# Altium PCB controller.PcbDoc (part 1 of 2)
Units mm, origin at the board's own origin, x right, y up, seen from the top; angles counter-clockwise.
Board outline 61.75 x 57 mm, 2 copper layers (Top Layer, Bottom Layer), stack 1.57 mm thick; 231 components, 171 nets, 622 pads, 230 vias.
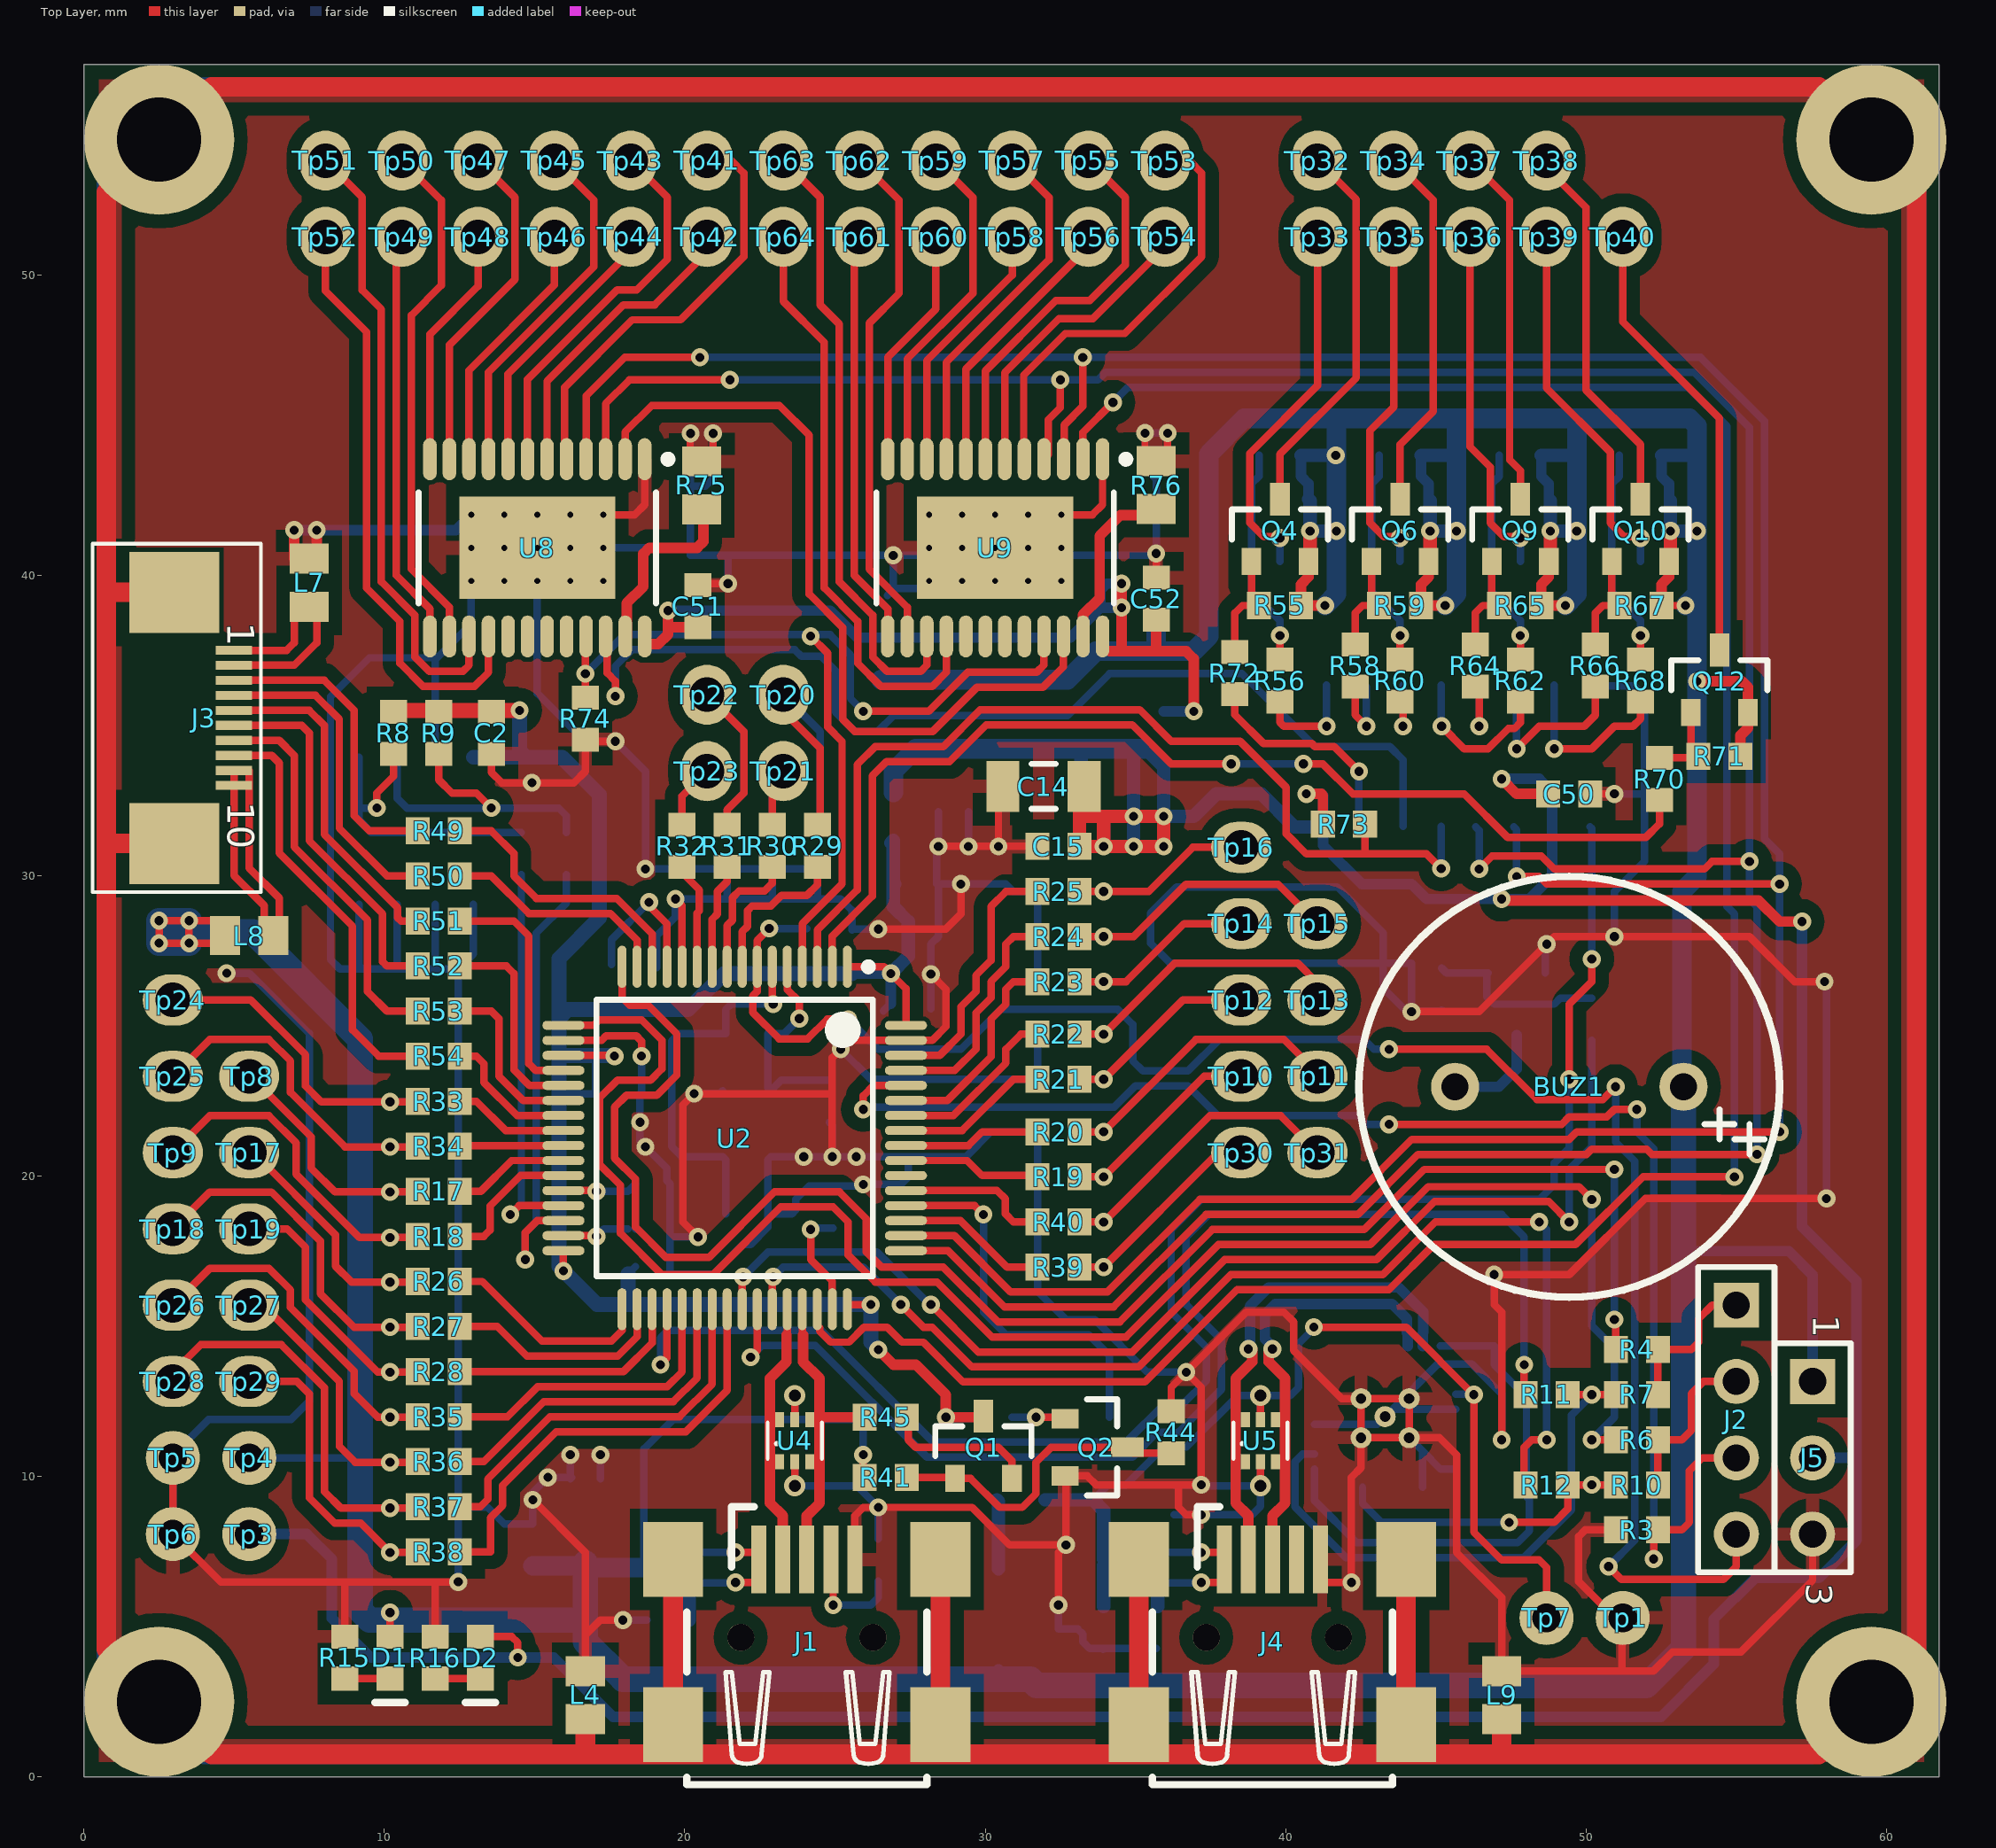
[diagram p0: Top Layer view]
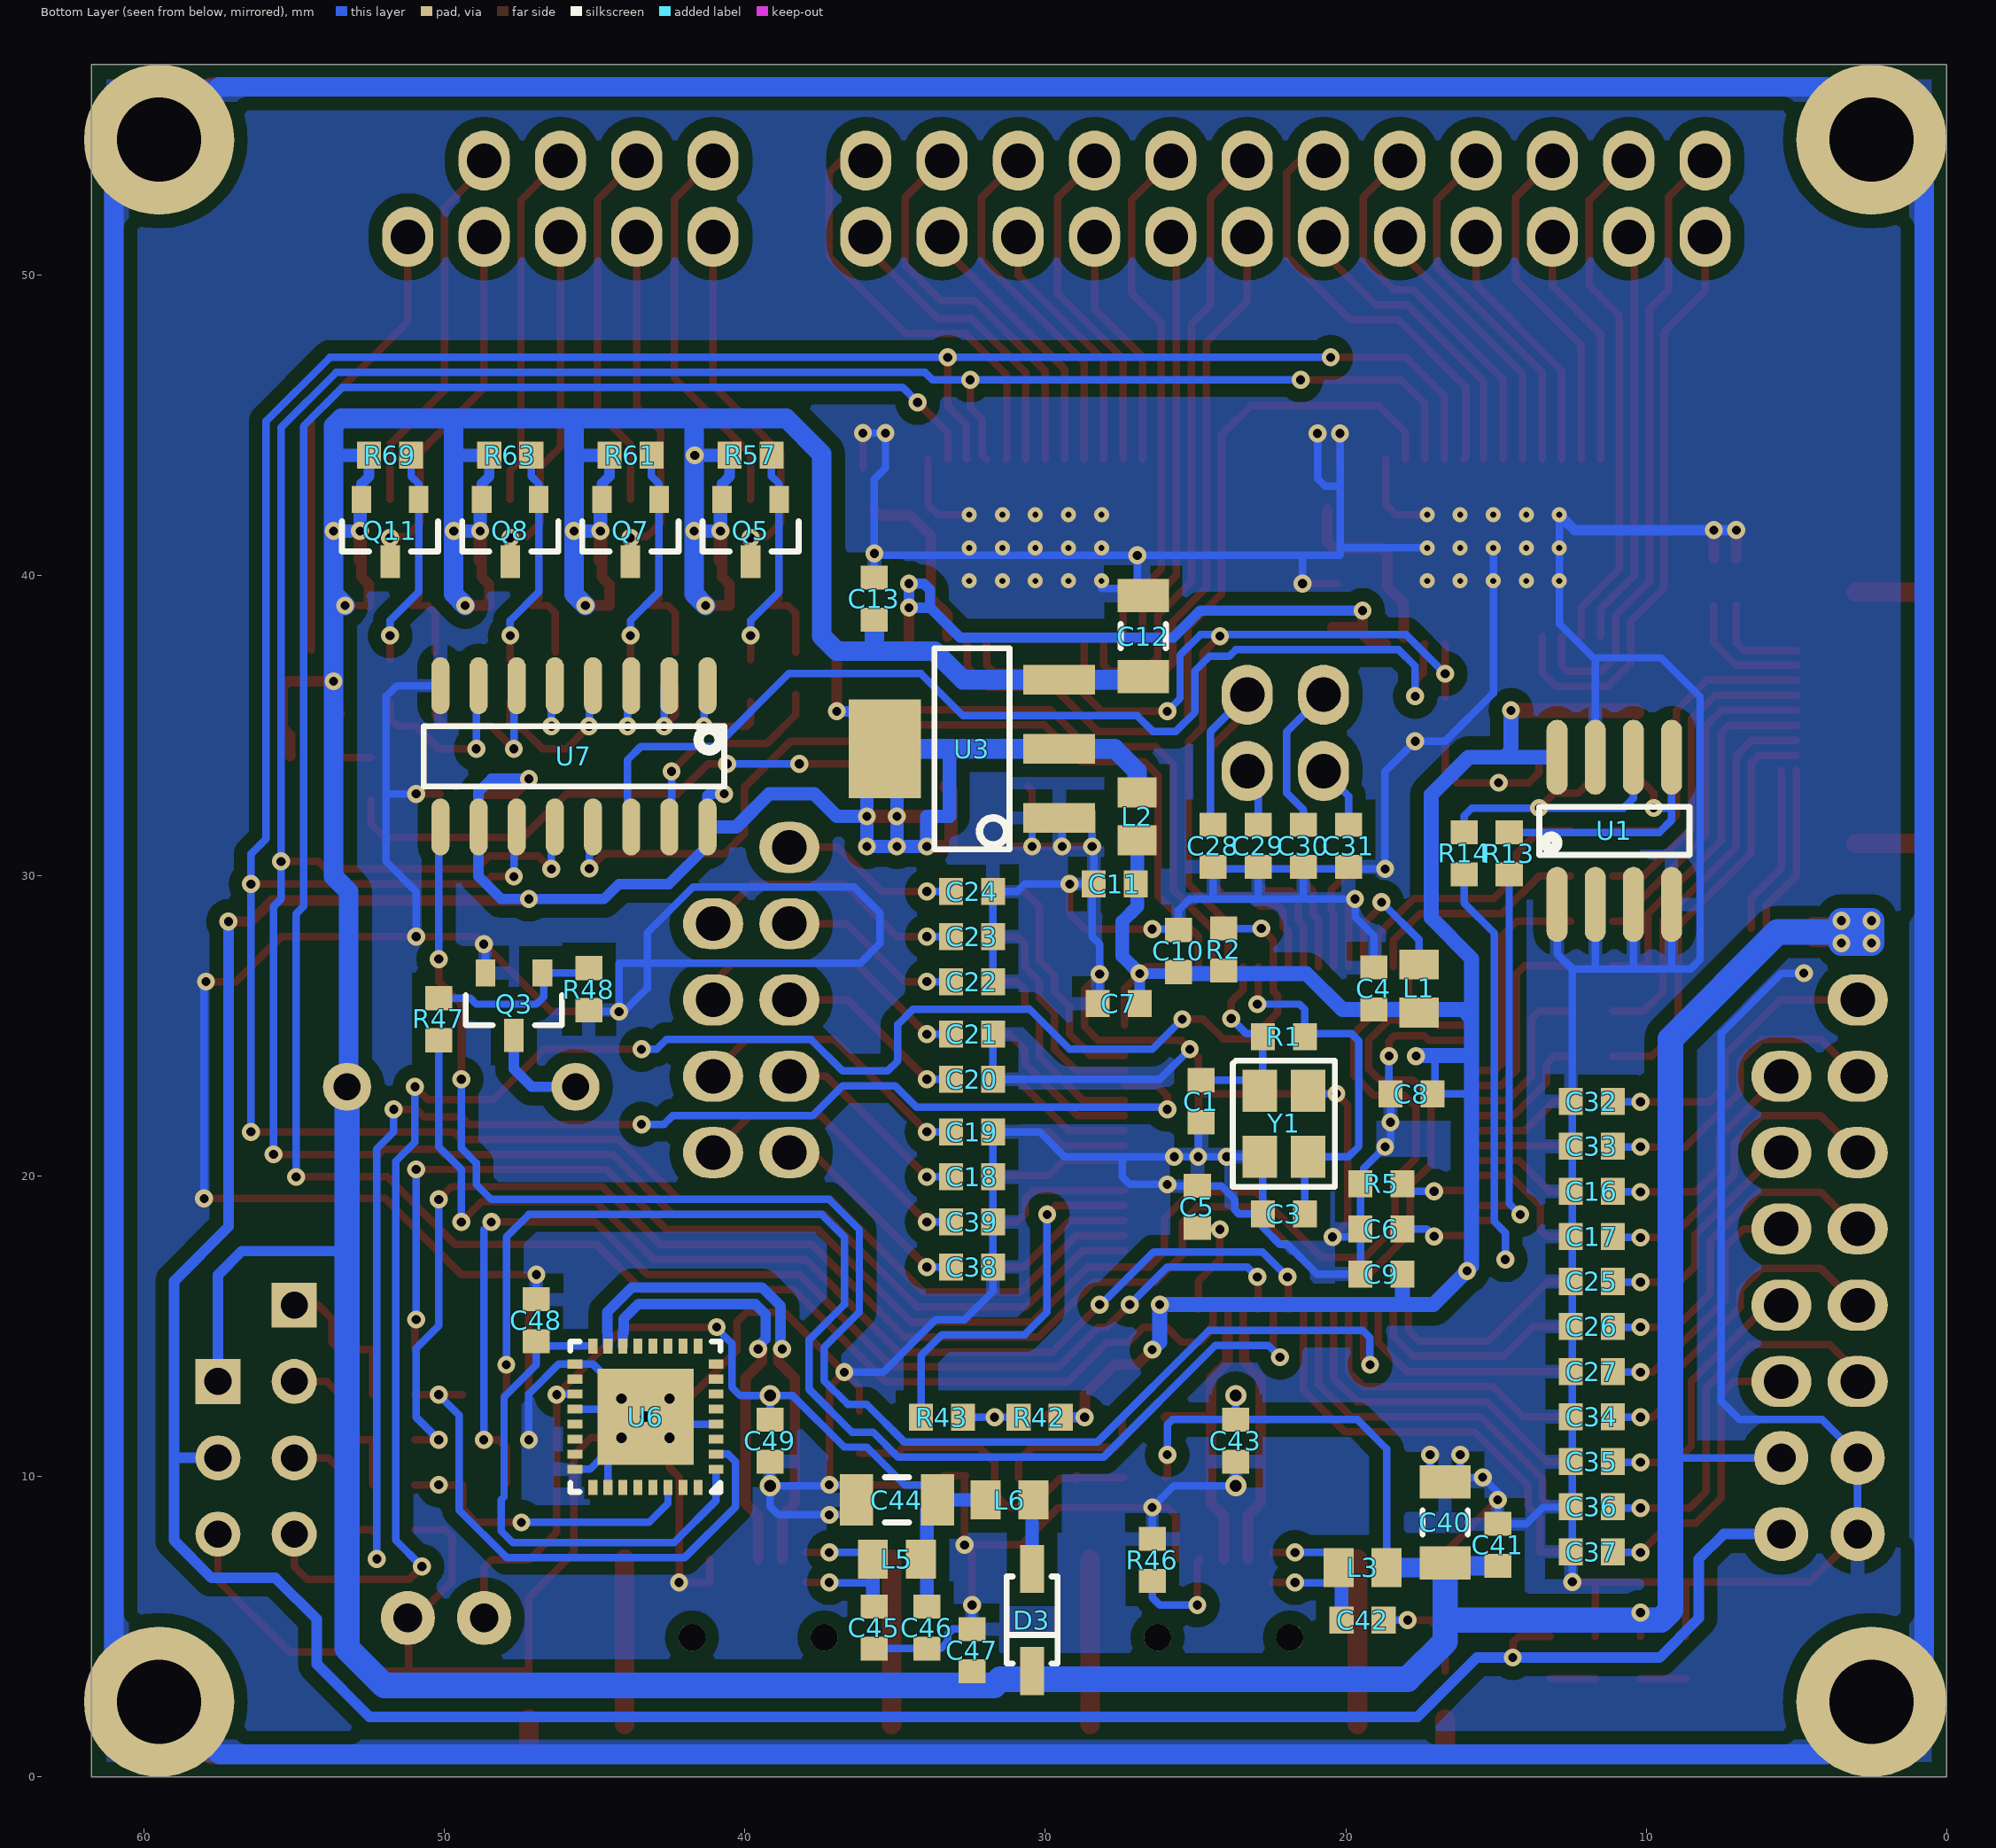
[diagram p1: Bottom Layer view, seen from below]
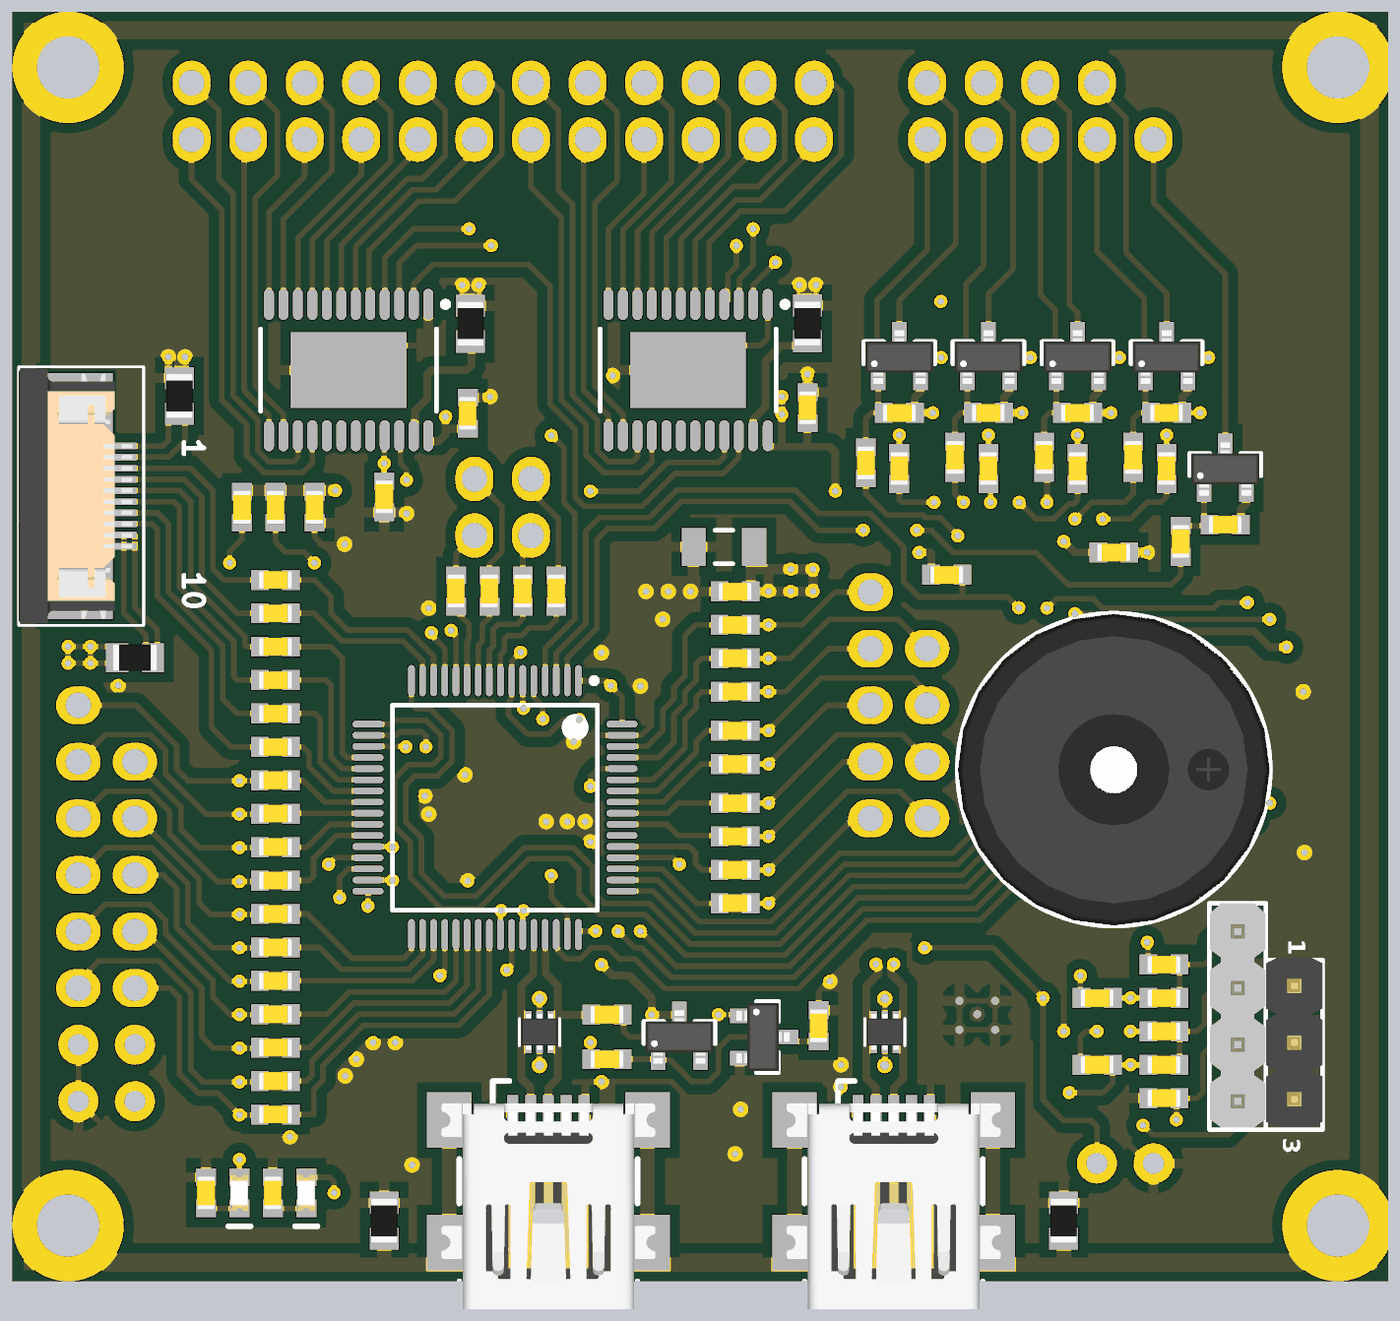
[diagram p3: 3D render of the assembled board from above, using the file's embedded part models]
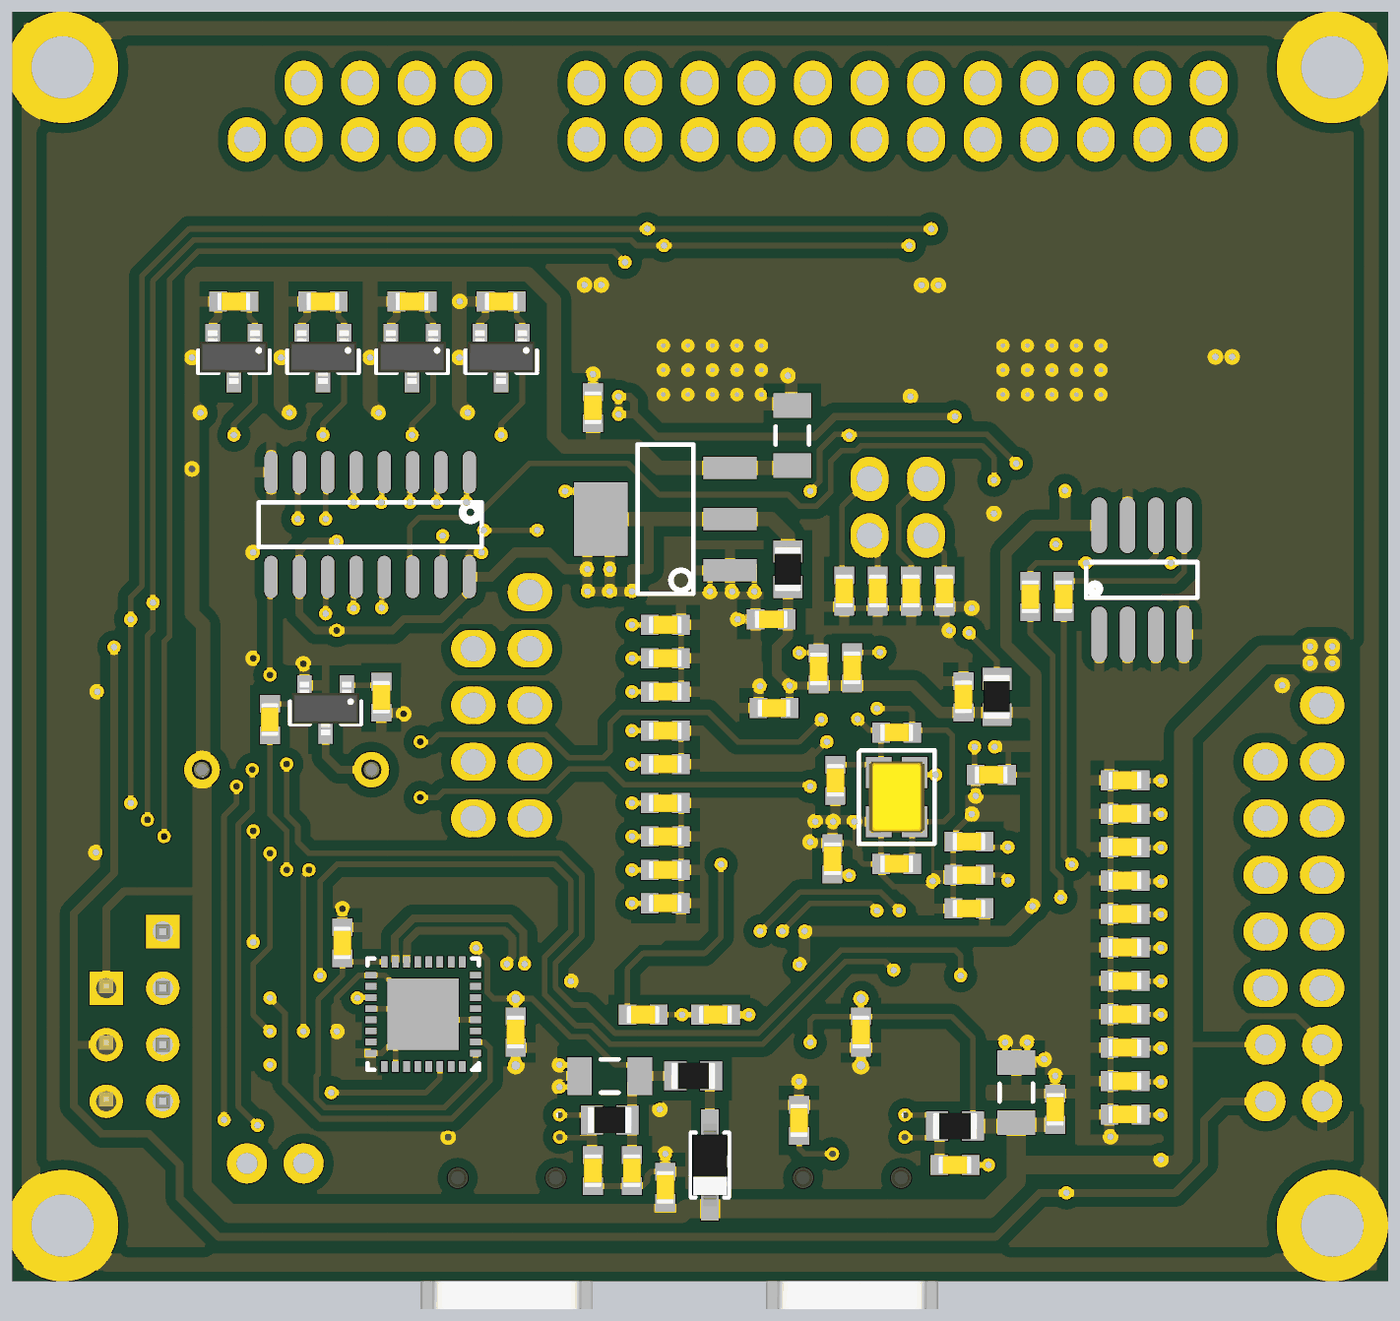
[diagram p4: 3D render of the assembled board from below, using the file's embedded part models]

## Layer stack, top to bottom
Top Solder: solder mask 0.0102, Solder Resist, Dk 3.5
Top Layer: signal copper 0.035
Dielectric1: core 1.5, FR-4, Dk 4.2
Bottom Layer: signal copper 0.035
Bottom Solder: solder mask 0.0102, Solder Resist, Dk 3.5

## Board outline
0,0 61.75,0 61.75,57 0,57

## Design rules (kind name [scope] priority, off if disabled: settings)
Clearance Clearance_comp [incomponent('u9','u8','u6','u5','u4','u2','j3')] p1: gap=0.15
Clearance [All vs not InAnyDifferentialPair] p2: gap=0.25 except(0.45: Arc-Fill Arc-Poly Track-Fill Track-Poly SMDPad-Fill SMDPad-Poly THPad-Fill THPad-Poly Via-Fill Via-Poly Fill-Fill Fill-Poly Poly-Poly)
ComponentClearance ComponentClearance_con [HasFootprint('HEADER_1X3_2.54MM_THD') or HasFootprint('HEADER_1X4_2.54MM_THD')] p1: gap=0 collisioncheckmode=3 verticalgap=0 showdistances=FALSE
ComponentClearance [All] p2: gap=0.25 collisioncheckmode=3 verticalgap=0.25 showdistances=FALSE
DiffPairsRouting [All] p1: maxlimit=0.2 minlimit=0.2 mostfreqgap=0.2 toplayer_minwidth=0.25 toplayer_maxwidth=1 toplayer_prefwidth=0.25 bottomlayer_minwidth=0.25 bottomlayer_maxwidth=1 bottomlayer_prefwidth=0.25 maxuncoupledlength=12.7
HoleSize [All] p1: absolutevalues=TRUE maxlimit=10 minlimit=0.2 maxpercent=80.000 minpercent=20.000
HoleToHoleClearance [All] p1: gap=0.25 allowstackedmicrovias=TRUE
MinimumSolderMaskSliver [All] p1: minsoldermaskwidth=0.15
PlaneClearance [All] p1: clearance=0.5
PlaneConnect PlaneConnect_via [isvia] p1: planeconnectstyle=Direct reliefexpansion=0.508 reliefentries=4 reliefconductorwidth=0.254 reliefairgap=0.254
PlaneConnect [All] p2: planeconnectstyle=Relief reliefexpansion=0.6 reliefentries=4 reliefconductorwidth=0.35 reliefairgap=0.35
PolygonConnect PolygonConnect_hole [(ObjectKind = 'Pad') And (Name = 'Free-Hole') And (AsMM(HoleDiameter) = 2.8)] p1: connectstyle=Direct reliefconductorwidth=0.254 reliefentries=4 polygonreliefangle="90 Angle" airgapwidth=0.254
PolygonConnect PolygonConnect_via [isvia] p2: connectstyle=Direct reliefconductorwidth=0.254 reliefentries=4 polygonreliefangle="90 Angle" airgapwidth=0.254
PolygonConnect [All] p3: connectstyle=Relief reliefconductorwidth=0.45 reliefentries=4 polygonreliefangle="90 Angle" airgapwidth=0.45
RoutingCorners [All] p1: cornerstyle=45-Degree minsetback=2.5 maxsetback=2.5
RoutingVias [All] p1: holewidth=0.3 width=0.6 viastyle="Through Hole" minholewidth=0.2 minwidth=0.35 maxholewidth=0.5 maxwidth=1
SilkToSilkClearance [All] p1: silktosilkclearance=0.1
SilkToSolderMaskClearance [IsPad] p1: minsilkscreentomaskgap=0.15 clearancetoexposedcopper=TRUE
SolderMaskExpansion SolderMaskExpansion_via [isVia] p1: expansion=-10
SolderMaskExpansion [All] p2: expansion=0.05
Width [All] p1: maxlimit=5 minlimit=0.15 preferedwidth=0.25
20 further rules are at their usual default settings.

## Classes and differential pairs
net class Power: +3.3V +5V VDD
net class sipo: EN_LED_COL EN_LED_ROW PA13 PA14 PA15 PB15
net class usb_diff: USB_N USB_P
differential pair FTDIUSB: +FTDIUSB_P -FTDIUSB_N
differential pair USB: +USB_P -USB_N

## Components (designator, comment, footprint, x,y, rotation, side; value= is the part's Value field where it differs from the comment)
BUZ1 "BUZZER" BUZZER_14MM_THD 49.44,22.97 r180 top
C1 "27pF" 0603_[1608] 24.81,22.49 r270 bottom
C2 "100nF" 0603_[1608] 13.56,34.75 r90 top
C3 "27pF" 0603_[1608] 22.06,18.74 r0 bottom
C4 "1uF" 0603_[1608] 19.06,26.24 r90 bottom
C5 "2.2uF" 0603_[1608] 24.94,18.97 r270 bottom
C6 "2.2uF" 0603_[1608] 18.81,18.24 r180 bottom
C7 "100nF" 0603_[1608] 27.56,25.74 r0 bottom
C8 "100nF" 0603_[1608] 17.81,22.74 r0 bottom
C9 "100nF" 0603_[1608] 18.81,16.74 r0 bottom
C10 "100nF" 0603_[1608] 25.56,27.49 r90 bottom
C11 "4.7uF" 0603_[1608] 27.69,29.72 r180 bottom
C12 "10uF" 1206_[3216] 26.74,37.97 r90 bottom
C13 "100nF" 0603_[1608] 35.69,39.22 r270 bottom
C14 "10uF" 1206_[3216] 31.94,32.97 r180 top
C15 "100nF" 0603_[1608] 32.44,30.97 r0 top
C16 "100nF" 0603_[1608] 11.81,19.49 r0 bottom
C17 "100nF" 0603_[1608] 11.81,17.99 r0 bottom
C18 "100nF" 0603_[1608] 32.44,19.97 r180 bottom
C19 "100nF" 0603_[1608] 32.44,21.47 r180 bottom
C20 "100nF" 0603_[1608] 32.44,23.22 r180 bottom
C21 "100nF" 0603_[1608] 32.44,24.72 r180 bottom
C22 "100nF" 0603_[1608] 32.44,26.47 r180 bottom
C23 "100nF" 0603_[1608] 32.44,27.97 r180 bottom
C24 "100nF" 0603_[1608] 32.44,29.47 r180 bottom
C25 "100nF" 0603_[1608] 11.81,16.49 r0 bottom
C26 "100nF" 0603_[1608] 11.81,14.99 r0 bottom
C27 "100nF" 0603_[1608] 11.81,13.49 r0 bottom
C28 "100nF" 0603_[1608] 24.41,30.99 r270 bottom
C29 "100nF" 0603_[1608] 22.91,30.99 r270 bottom
C30 "100nF" 0603_[1608] 21.41,30.99 r270 bottom
C31 "100nF" 0603_[1608] 19.91,30.99 r270 bottom
C32 "100nF" 0603_[1608] 11.81,22.49 r0 bottom
C33 "100nF" 0603_[1608] 11.81,20.99 r0 bottom
C34 "100nF" 0603_[1608] 11.81,11.99 r0 bottom
C35 "100nF" 0603_[1608] 11.81,10.49 r0 bottom
C36 "100nF" 0603_[1608] 11.81,8.99 r0 bottom
C37 "100nF" 0603_[1608] 11.81,7.49 r0 bottom
C38 "100nF" 0603_[1608] 32.44,16.97 r180 bottom
C39 "100nF" 0603_[1608] 32.44,18.47 r180 bottom
C40 "4.7uF" 1206_[3216] 16.69,8.47 r90 bottom
C41 "100nF" 0603_[1608] 14.94,7.72 r90 bottom
C42 "10nF" 0603_[1608] 19.44,5.22 r180 bottom
C43 "100nF" 0603_[1608] 23.66,11.19 r90 bottom
C44 "4.7uF" 1206_[3216] 34.94,9.22 r0 bottom
C45 "10nF" 0603_[1608] 35.69,4.97 r270 bottom
C46 "100nF" 0603_[1608] 33.94,4.97 r270 bottom
C47 "100nF" 0603_[1608] 32.44,4.22 r270 bottom
C48 "100nF" 0603_[1608] 46.94,15.195 r90 bottom
C49 "100nF" 0603_[1608] 39.16,11.19 r90 bottom
C50 "100nF" 0603_[1608] 49.44,32.72 r0 top
C51 "100nF" 0603_[1608] 20.44,38.97 r270 top
C52 "100nF" 0603_[1608] 35.69,39.22 r270 top
D1 "+5V" 0603_[1608]_K2-A1_LED 10.19,3.97 r270 top
D2 "+3.3V" 0603_[1608]_K2-A1_LED 13.19,3.97 r270 top
D3 "MBR120VLSFT1G" SOD-123 30.44,5.22 r270 bottom
J1 "Mini USB Type B" usb_typeB_mini_smd 24.06,4.49 r0 top
J2 "PCB Conn" HEADER_1X4_2.54MM_THD 55,11.89 r270 top
J3 "Display" fcc-zif_10pin_0.5mm 4,35.25 r270 top
J4 "Mini USB Type B" usb_typeB_mini_smd 39.56,4.49 r0 top
J5 "PCB Conn" HEADER_1X3_2.54MM_THD 57.54,10.62 r270 top
L1 "220 ohm @ 100MHz" 0805_[2012] 17.56,26.24 r90 bottom
L2 "220 ohm @ 100MHz" 0805_[2012] 26.94,31.97 r270 bottom
L3 "220 ohm @ 100MHz" 0805_[2012] 19.44,6.97 r0 bottom
L4 "220 ohm @ 100MHz" 0805_[2012] 16.69,2.72 r270 top
L5 "220 ohm @ 100MHz" 0805_[2012] 34.94,7.24 r0 bottom
L6 "220 ohm @ 100MHz" 0805_[2012] 31.19,9.22 r0 bottom
L7 "220 ohm @ 100MHz" 0805_[2012] 7.5,39.75 r270 top
L8 "220 ohm @ 100MHz" 0805_[2012] 5.5,28 r0 top
L9 "220 ohm @ 100MHz" 0805_[2012] 47.19,2.72 r270 top
Q1 "BC817" SOT-23 29.94,10.97 r90 top
Q2 "BC817" SOT-23 33.69,10.97 r0 top
Q3 "BC817" SOT-23 47.69,25.72 r270 bottom
Q4 "MOSFET P" SOT-23 39.81,41.49 r90 top
Q5 "MOSFET P" SOT-23 39.81,41.49 r270 bottom
Q6 "MOSFET P" SOT-23 43.81,41.49 r90 top
Q7 "MOSFET P" SOT-23 43.81,41.49 r270 bottom
Q8 "MOSFET P" SOT-23 47.81,41.49 r270 bottom
Q9 "MOSFET P" SOT-23 47.81,41.49 r90 top
Q10 "MOSFET P" SOT-23 51.81,41.49 r90 top
Q11 "MOSFET P" SOT-23 51.81,41.49 r270 bottom
Q12 "MOSFET P" SOT-23 54.44,36.47 r90 top
R1 "1M" 0603_[1608] 22.06,24.64 r0 bottom
R2 "10K" 0603_[1608] 24.06,27.54 r90 bottom
R3 "10K" 0603_[1608] 51.69,8.22 r0 top
R4 "33R" 0603_[1608] 51.69,14.22 r0 top
R5 "10K" 0603_[1608] 18.81,19.74 r0 bottom
R6 "33R" 0603_[1608] 51.69,11.22 r0 top
R7 "33R" 0603_[1608] 51.69,12.72 r180 top
R8 "10K" 0603_[1608] 10.31,34.75 r90 top
R9 "10K" 0603_[1608] 11.81,34.75 r90 top
R10 "33R" 0603_[1608] 51.69,9.72 r180 top
R11 "33R" 0603_[1608] 48.69,12.72 r0 top
R12 "33R" 0603_[1608] 48.69,9.72 r0 top
R13 "33R" 0603_[1608] 14.56,30.74 r270 bottom
R14 "33R" 0603_[1608] 16.06,30.74 r270 bottom
R15 "680R" 0603_[1608] 8.69,3.97 r270 top
R16 "180R" 0603_[1608] 11.69,3.97 r270 top
R17 "33R" 0603_[1608] 11.81,19.49 r0 top
R18 "33R" 0603_[1608] 11.81,17.99 r0 top
R19 "33R" 0603_[1608] 32.44,19.97 r180 top
R20 "33R" 0603_[1608] 32.44,21.47 r180 top
R21 "33R" 0603_[1608] 32.44,23.22 r180 top
R22 "33R" 0603_[1608] 32.44,24.72 r180 top
R23 "33R" 0603_[1608] 32.44,26.47 r180 top
R24 "33R" 0603_[1608] 32.44,27.97 r180 top
R25 "33R" 0603_[1608] 32.44,29.47 r180 top
R26 "33R" 0603_[1608] 11.81,16.49 r0 top
R27 "33R" 0603_[1608] 11.81,14.99 r0 top
R28 "33R" 0603_[1608] 11.81,13.49 r0 top
R29 "33R" 0603_[1608] 24.41,30.99 r270 top
R30 "33R" 0603_[1608] 22.91,30.99 r270 top
R31 "33R" 0603_[1608] 21.41,30.99 r270 top
R32 "33R" 0603_[1608] 19.91,30.99 r270 top
R33 "33R" 0603_[1608] 11.81,22.49 r0 top
R34 "33R" 0603_[1608] 11.81,20.99 r0 top
R35 "33R" 0603_[1608] 11.81,11.99 r0 top
R36 "33R" 0603_[1608] 11.81,10.49 r0 top
R37 "33R" 0603_[1608] 11.81,8.99 r0 top
R38 "33R" 0603_[1608] 11.81,7.49 r0 top
R39 "33R" 0603_[1608] 32.44,16.97 r180 top
R40 "33R" 0603_[1608] 32.44,18.47 r180 top
R41 "10k" 0603_[1608] 26.69,9.97 r0 top
R42 "47k" 0603_[1608] 30.19,11.97 r0 bottom
R43 "1k" 0603_[1608] 33.44,11.97 r0 bottom
R44 "33k" 0603_[1608] 36.19,11.47 r90 top
R45 "1k5" 0603_[1608] 26.69,11.97 r180 top
R46 "100K" 0603_[1608] 26.44,7.22 r90 bottom
R47 "1k" 0603_[1608] 50.19,25.22 r270 bottom
R48 "47k" 0603_[1608] 45.19,26.22 r270 bottom
R49 "33R" 0603_[1608] 11.81,31.49 r0 top
R50 "33R" 0603_[1608] 11.81,29.99 r0 top
R51 "33R" 0603_[1608] 11.81,28.49 r0 top
R52 "33R" 0603_[1608] 11.81,26.99 r0 top
R53 "33R" 0603_[1608] 11.81,25.49 r0 top
R54 "33R" 0603_[1608] 11.81,23.99 r0 top
R55 "4k7" 0603_[1608] 39.81,38.99 r180 top
R56 "1k" 0603_[1608] 39.81,36.49 r90 top
R57 "4k7" 0603_[1608] 39.81,43.99 r180 bottom
R58 "1k" 0603_[1608] 42.31,36.99 r90 top
R59 "4k7" 0603_[1608] 43.81,38.99 r180 top
R60 "1k" 0603_[1608] 43.81,36.49 r90 top
R61 "4k7" 0603_[1608] 43.81,43.99 r180 bottom
R62 "1k" 0603_[1608] 47.81,36.49 r90 top
R63 "4k7" 0603_[1608] 47.81,43.99 r180 bottom
R64 "1k" 0603_[1608] 46.31,36.99 r90 top
R65 "4k7" 0603_[1608] 47.81,38.99 r180 top
R66 "1k" 0603_[1608] 50.31,36.99 r90 top
R67 "4k7" 0603_[1608] 51.81,38.99 r180 top
R68 "1k" 0603_[1608] 51.81,36.49 r90 top
R69 "4k7" 0603_[1608] 51.81,43.99 r180 bottom
R70 "1k" 0603_[1608] 52.44,33.22 r90 top
R71 "4k7" 0603_[1608] 54.44,33.97 r180 top
R72 "1k" 0603_[1608] 38.31,36.74 r270 top
R73 "10k" 0603_[1608] 41.94,31.72 r0 top
R74 "10k" 0603_[1608] 16.69,35.22 r90 top
R75 "3k3" 0805_[2012] 20.56,42.99 r270 top
R76 "3k3" 0805_[2012] 35.69,43 r270 top
Tp1 "GND" TEST_POINT_THD_D1.8MM 51.22,5.29 r0 top
Tp3 "+3.3V" TEST_POINT_THD_D1.8MM 5.5,8.08 r0 top
Tp4 "+5V" TEST_POINT_THD_D1.8MM 5.5,10.62 r0 top
Tp5 "GND" TEST_POINT_THD_D1.8MM 2.96,10.62 r0 top
Tp6 "GND" TEST_POINT_THD_D1.8MM 2.96,8.08 r0 top
Tp7 "Vusb" TEST_POINT_THD_D1.8MM 48.68,5.29 r0 top
Tp8 "PB0" TEST_POINT_THD_D1.6mm_oval 5.5,23.32 r90 top
Tp9 "PB0" TEST_POINT_THD_D1.6mm_oval 2.96,20.78 r90 top
Tp10 "PB0" TEST_POINT_THD_D1.6mm_oval 38.52,23.32 r270 top
Tp11 "PB0" TEST_POINT_THD_D1.6mm_oval 41.06,23.32 r90 top
Tp12 "PB0" TEST_POINT_THD_D1.6mm_oval 38.52,25.86 r90 top
Tp13 "PB0" TEST_POINT_THD_D1.6mm_oval 41.06,25.86 r90 top
Tp14 "PB0" TEST_POINT_THD_D1.6mm_oval 38.52,28.4 r90 top
Tp15 "PB0" TEST_POINT_THD_D1.6mm_oval 41.06,28.4 r90 top
Tp16 "PB0" TEST_POINT_THD_D1.6mm_oval 38.52,30.94 r90 top
Tp17 "PB0" TEST_POINT_THD_D1.6mm_oval 5.5,20.78 r90 top
Tp18 "PB0" TEST_POINT_THD_D1.6mm_oval 2.96,18.24 r90 top
Tp19 "PB0" TEST_POINT_THD_D1.6mm_oval 5.5,18.24 r90 top
Tp20 "PB0" TEST_POINT_THD_D1.6mm_oval 23.28,36.02 r0 top
Tp21 "PB0" TEST_POINT_THD_D1.6mm_oval 23.28,33.48 r180 top
Tp22 "PB0" TEST_POINT_THD_D1.6mm_oval 20.74,36.02 r180 top
Tp23 "PB0" TEST_POINT_THD_D1.6mm_oval 20.74,33.48 r180 top
Tp24 "PB0" TEST_POINT_THD_D1.6mm_oval 2.96,25.86 r90 top
Tp25 "PB0" TEST_POINT_THD_D1.6mm_oval 2.96,23.32 r90 top
Tp26 "PB0" TEST_POINT_THD_D1.6mm_oval 2.96,15.7 r90 top
Tp27 "PB0" TEST_POINT_THD_D1.6mm_oval 5.5,15.7 r90 top
Tp28 "PB0" TEST_POINT_THD_D1.6mm_oval 2.96,13.16 r90 top
Tp29 "PB0" TEST_POINT_THD_D1.6mm_oval 5.5,13.16 r90 top
Tp30 "PB0" TEST_POINT_THD_D1.6mm_oval 38.52,20.78 r90 top
Tp31 "PB0" TEST_POINT_THD_D1.6mm_oval 41.06,20.78 r90 top
Tp32 "PB0" TEST_POINT_THD_D1.6MM_OVAL 41.06,53.8 r0 top
Tp33 "PB0" TEST_POINT_THD_D1.6MM_OVAL 41.06,51.26 r0 top
Tp34 "PB0" TEST_POINT_THD_D1.6MM_OVAL 43.6,53.8 r0 top
Tp35 "PB0" TEST_POINT_THD_D1.6MM_OVAL 43.6,51.26 r0 top
Tp36 "PB0" TEST_POINT_THD_D1.6MM_OVAL 46.14,51.26 r0 top
Tp37 "PB0" TEST_POINT_THD_D1.6MM_OVAL 46.14,53.8 r0 top
Tp38 "PB0" TEST_POINT_THD_D1.6MM_OVAL 48.68,53.8 r0 top
Tp39 "PB0" TEST_POINT_THD_D1.6MM_OVAL 48.68,51.26 r0 top
Tp40 "PB0" TEST_POINT_THD_D1.6MM_OVAL 51.22,51.26 r0 top
Tp41 "PB0" TEST_POINT_THD_D1.6MM_OVAL 20.74,53.8 r180 top
Tp42 "PB0" TEST_POINT_THD_D1.6MM_OVAL 20.74,51.26 r180 top
Tp43 "PB0" TEST_POINT_THD_D1.6MM_OVAL 18.2,53.8 r180 top
Tp44 "PB0" TEST_POINT_THD_D1.6MM_OVAL 18.2,51.26 r180 top
Tp45 "PB0" TEST_POINT_THD_D1.6MM_OVAL 15.66,53.8 r180 top
Tp46 "PB0" TEST_POINT_THD_D1.6MM_OVAL 15.66,51.26 r180 top
Tp47 "PB0" TEST_POINT_THD_D1.6MM_OVAL 13.12,53.8 r180 top
Tp48 "PB0" TEST_POINT_THD_D1.6MM_OVAL 13.12,51.26 r180 top
Tp49 "PB0" TEST_POINT_THD_D1.6MM_OVAL 10.58,51.26 r180 top
Tp50 "PB0" TEST_POINT_THD_D1.6MM_OVAL 10.58,53.8 r180 top
Tp51 "PB0" TEST_POINT_THD_D1.6MM_OVAL 8.04,53.8 r180 top
Tp52 "PB0" TEST_POINT_THD_D1.6MM_OVAL 8.04,51.26 r180 top
Tp53 "PB0" TEST_POINT_THD_D1.6MM_OVAL 35.98,53.8 r180 top
Tp54 "PB0" TEST_POINT_THD_D1.6MM_OVAL 35.98,51.26 r180 top
Tp55 "PB0" TEST_POINT_THD_D1.6MM_OVAL 33.44,53.8 r180 top
Tp56 "PB0" TEST_POINT_THD_D1.6MM_OVAL 33.44,51.26 r180 top
Tp57 "PB0" TEST_POINT_THD_D1.6MM_OVAL 30.9,53.8 r180 top
Tp58 "PB0" TEST_POINT_THD_D1.6MM_OVAL 30.9,51.26 r180 top
Tp59 "PB0" TEST_POINT_THD_D1.6MM_OVAL 28.36,53.8 r180 top
Tp60 "PB0" TEST_POINT_THD_D1.6MM_OVAL 28.36,51.26 r180 top
Tp61 "PB0" TEST_POINT_THD_D1.6MM_OVAL 25.82,51.26 r180 top
Tp62 "PB0" TEST_POINT_THD_D1.6MM_OVAL 25.82,53.8 r180 top
Tp63 "PB0" TEST_POINT_THD_D1.6MM_OVAL 23.28,53.8 r180 top
Tp64 "PB0" TEST_POINT_THD_D1.6MM_OVAL 23.28,51.26 r180 top
U1 "24C128" SOIC8 11.06,31.49 r90 bottom locked
U2 "STM32F103RB" TSQFP50P1200X1200X160-64N 21.66,21.265 r270 top
U3 "LM1117xxx-3.3" SOT-223 32.44,34.22 r0 bottom
U4 "TVS Array (WE 82400152)" SOT-563 23.66,11.19 r0 top
U5 "TVS Array (WE 82400152)" SOT-563 39.16,11.19 r0 top
U6 "FT232RQ" QFN-32 43.31,11.99 r0 bottom
U7 "MC74HC595AD" SOIC16 45.69,33.97 r270 bottom
U8 "Led Driver" TSOP65P640X120_HS-25N 15.09,40.91 r270 top
U9 "Led Driver" TSOP65P640X120_HS-25N 30.33,40.91 r270 top
Y1 "8MHz" CRYSTAL_3.2X2.5MM_4P_SMD 22.06,21.74 r270 bottom

## Footprints (in the part's own frame and the unit in brackets; to place one, negate y for a bottom-side part, rotate by r counter-clockwise, add the part's x,y. Pads: shape width x height; smd on the part's side, far side on the other; paste and mask are expansions set on the pad)
0603_[1608] [mm] "Chip Capacitor, Body 1.6x0.8mm, IPC High Density"
  rect 0.8x0.9 smd: 1(-0.7,0) 2(0.7,0)
  body extent -0.75,-0.4 0.75,0.4, height 0.67
0603_[1608]_K2-A1_LED [mm] "SMD led 0603 size"
  rect 0.8x0.9 smd: 1(-0.7,0) 2(0.7,0)
  silkscreen extent 1.5,-0.5 1.5,0.5, body extent -0.8,-0.4 0.8,0.4, height 0.7
0805_[2012] [mm] "Chip Resistor, Body 2.0x1.2mm, IPC High Density"
  rect 1x1.3 smd: 1(-0.8,0) 2(0.8,0)
  body extent -1,-0.6 1,0.6, height 0.62
1206_[3216] [mm] "Chip Capacitor, Body 3.2x1.6mm, IPC High Density"
  rect 1.1x1.7 smd: 1(-1.35,0) 2(1.35,0)
  silkscreen extent -0.4,-0.75 0.4,0.75, body extent -1.7,-0.9 1.7,0.9, height 1.3
BUZZER_14MM_THD [mm]
  round 1.6 hole 0.9: 1(-3.8,0) 2(3.8,0)
  silkscreen extent -7,-7 7,7, body extent -7,-7 7,7, height 7.4
CRYSTAL_3.2X2.5MM_4P_SMD [mil] "quarz crystal smd 4 lead"
  rect 55.1x45.27 smd: 1(-43.3,-31.5) 2(43.3,-31.5) 3(43.3,31.5) 4(-43.3,31.5)
  silkscreen extent -83,-67 83,67, body extent -63,-49 63,49, height 31
fcc-zif_10pin_0.5mm [mm] "10 pins"
  rect 0.3x1.2 smd: 1(-2.25,0.99) 2(-1.75,0.99) 3(-1.25,0.99) 4(-0.75,0.99) 5(-0.25,0.99) 6(0.25,0.99) 7(0.75,0.99) 8(1.25,0.99) 9(1.75,0.99) 10(2.25,0.99)
  rect 2.7x3 smd: Z1(-4.18,-0.99) Z2(4.18,-0.99)
  silkscreen extent -5.8,-3.71 5.8,1.89, body extent -5.7,-3.71 5.7,1.39, height 2.06
HEADER_1X3_2.54MM_THD [mm] "pin header 2.54mm 1row 3pin"
  rect 1.5x1.5 hole 0.9: 1(-2.54,0)
  round 1.5 hole 0.9: 2(0,0) 3(2.54,0)
  silkscreen extent -3.81,-1.27 3.81,1.27, body extent -3.91,-1.27 3.71,1.27, height 8.67
HEADER_1X4_2.54MM_THD [mm] "Connector; Header; 4 Position"
  rect 1.5x1.5 hole 0.9: 1(-3.81,0)
  round 1.5 hole 0.9: 2(-1.27,0) 3(1.27,0) 4(3.81,0)
  silkscreen extent -5.08,-1.27 5.08,1.27, body extent -5.08,-1.25 4.98,1.25, height 8.2
QFN-32 [mm]
  rect 0.5x0.3 smd: 1(-2.35,1.75) 2(-2.35,1.25) 3(-2.35,0.75) 4(-2.35,0.25) 5(-2.35,-0.25) 6(-2.35,-0.75) 7(-2.35,-1.25) 8(-2.35,-1.75) 17(2.35,-1.75) 18(2.35,-1.25) 19(2.35,-0.75) 20(2.35,-0.25) 21(2.35,0.25) 22(2.35,0.75) 23(2.35,1.25) 24(2.35,1.75)
  rect 0.3x0.5 smd: 9(-1.75,-2.35) 10(-1.25,-2.35) 11(-0.75,-2.35) 12(-0.25,-2.35) 13(0.25,-2.35) 14(0.75,-2.35) 15(1.25,-2.35) 16(1.75,-2.35) 25(1.75,2.35) 26(1.25,2.35) 27(0.75,2.35) 28(0.25,2.35) 29(-0.25,2.35) 30(-0.75,2.35) 31(-1.25,2.35) 32(-1.75,2.35)
  round 0.7 hole 0.35 paste-10 mask-10: GND_PAD(-0.8,-0.6) GND_PAD(-0.8,0.7) GND_PAD(0,0) GND_PAD(0.8,-0.6) GND_PAD(0.8,0.7)
  rect 3.2x3.2 smd: GND_PAD(0,0)
  silkscreen extent -2.5,-2.5 2.5,2.5, body extent -2.5,-2.5 2.5,2.5, height 1.3
SOD-123 [mm] "SOD-123; 2 Leads; Body 2.7 x 1.6 mm, (LxW)"
  rect 1.6x0.8 smd: 1(1.7,0) 2(-1.7,0)
  silkscreen extent -1.45,-0.85 1.45,0.85, body extent -1.85,-0.8 1.85,0.8, height 1.27
SOIC8 [mm] "SOIC, 8-Leads, Body 4.9x3.8mm, Pitch 1.27mm, IPC Low Density"
  oval 2.5x0.7 smd: 1(-2.45,1.905) 2(-2.45,0.635) 3(-2.45,-0.635) 4(-2.45,-1.905) 5(2.45,-1.905) 6(2.45,-0.635) 7(2.45,0.635) 8(2.45,1.905)
  silkscreen extent -0.8,-2.5 0.8,2.5, body extent -2,-2.5 2,2.5, height 1.75
SOIC16 [mm] "SOIC, 16-Leads, Body 9.9x3.9mm, Pitch 1.27mm, IPC High Density"
  oval 1.9x0.6 smd: 1(-2.35,4.445) 2(-2.35,3.175) 3(-2.35,1.905) 4(-2.35,0.635) 5(-2.35,-0.635) 6(-2.35,-1.905) 7(-2.35,-3.175) 8(-2.35,-4.445) 9(2.35,-4.445) 10(2.35,-3.175) 11(2.35,-1.905) 12(2.35,-0.635) 13(2.35,0.635) 14(2.35,1.905) 15(2.35,3.175) 16(2.35,4.445)
  silkscreen extent -1,-5 1,5, body extent -2,-5 2,5, height 1.91
SOT-23 [mm] "SOT23, 3-Leads, Body 2.9x1.3mm, Pitch 0.95mm, Lead Span 2.5mm, IPC High Density"
  rect 0.9x0.65 smd: 1(-1.038,0.95) 2(-1.038,-0.95)
  rect 1.1x0.65 smd: 3(1.038,0)
  silkscreen extent -0.3,-1.6 0.7,1.6, body extent -1.2,-1.52 1.2,1.52, height 1.22
SOT-223 [mm] "SOT223, 4-Leads, Body 6.5x3.5mm, Pitch 2.3mm, Lead Span 7mm, IPC Medium Density"
  rect 2.4x1 smd: 1(-2.9,2.3) 2(-2.9,0) 3(-2.9,-2.3)
  rect 2.4x3.3 smd: 4(2.9,0)
  silkscreen extent -1.25,-3.35 1.25,3.35, body extent -1.85,-3.35 1.85,3.35, height 1.8
SOT-563 [mm]
  rect 0.3x0.5 smd: 1(-0.5,-0.7) 2(0,-0.7) 3(0.5,-0.7) 4(0.5,0.7) 5(0,0.7) 6(-0.5,0.7)
  silkscreen extent -0.9,-0.61 0.9,0.6, body extent -0.8,-0.79 0.8,0.81, height 0.55
TEST_POINT_THD_D1.6mm_oval [mm]
  oval 1.7x2 hole 1.15 paste-10 mask+0.05: 1(0,0)
TEST_POINT_THD_D1.6MM_OVAL [mm]
  oval 1.7x2 hole 1.15 paste-10 mask+0.05: 1(0,0)
TEST_POINT_THD_D1.8MM [mm] "Test point D=1.6MM"
  round 1.8 hole 0.95 paste-10 mask+0.05: 1(0,0)
TSOP65P640X120_HS-25N [mm] "TSOP, 24-Leads, Body 7,80x4,40mm, Pitch 0,65mm, Thermal Pad 5,20x3,40mm, IPC Medium Density"
  oval 1.4x0.45 smd: 1(-2.95,3.575) 2(-2.95,2.925) 3(-2.95,2.275) 4(-2.95,1.625) 5(-2.95,0.975) 6(-2.95,0.325) 7(-2.95,-0.325) 8(-2.95,-0.975) 9(-2.95,-1.625) 10(-2.95,-2.275) 11(-2.95,-2.925) 12(-2.95,-3.575) 13(2.95,-3.575) 14(2.95,-2.925) 15(2.95,-2.275) 16(2.95,-1.625) 17(2.95,-0.975) 18(2.95,-0.325) 19(2.95,0.325) 20(2.95,0.975) 21(2.95,1.625) 22(2.95,2.275) 23(2.95,2.925) 24(2.95,3.575)
  rect 3.4x5.2 smd: 25(0,0)
  silkscreen extent -3.07,-3.95 1.85,4.47, body extent -2.25,-3.95 2.25,3.95, height 1.2
TSQFP50P1200X1200X160-64N [mm] "TSQFP, 64-Leads, Body 10,00x10,00mm, Pitch 0,50mm, IPC Medium Density"
  oval 1.4x0.3 smd: 1(-5.7,3.75) 2(-5.7,3.25) 3(-5.7,2.75) 4(-5.7,2.25) 5(-5.7,1.75) 6(-5.7,1.25) 7(-5.7,0.75) 8(-5.7,0.25) 9(-5.7,-0.25) 10(-5.7,-0.75) 11(-5.7,-1.25) 12(-5.7,-1.75) 13(-5.7,-2.25) 14(-5.7,-2.75) 15(-5.7,-3.25) 16(-5.7,-3.75) 33(5.7,-3.75) 34(5.7,-3.25) 35(5.7,-2.75) 36(5.7,-2.25) 37(5.7,-1.75) 38(5.7,-1.25) 39(5.7,-0.75) 40(5.7,-0.25) 41(5.7,0.25) 42(5.7,0.75) 43(5.7,1.25) 44(5.7,1.75) 45(5.7,2.25) 46(5.7,2.75) 47(5.7,3.25) 48(5.7,3.75)
  oval 0.3x1.4 smd: 17(-3.75,-5.7) 18(-3.25,-5.7) 19(-2.75,-5.7) 20(-2.25,-5.7) 21(-1.75,-5.7) 22(-1.25,-5.7) 23(-0.75,-5.7) 24(-0.25,-5.7) 25(0.25,-5.7) 26(0.75,-5.7) 27(1.25,-5.7) 28(1.75,-5.7) 29(2.25,-5.7) 30(2.75,-5.7) 31(3.25,-5.7) 32(3.75,-5.7) 49(3.75,5.7) 50(3.25,5.7) 51(2.75,5.7) 52(2.25,5.7) 53(1.75,5.7) 54(1.25,5.7) 55(0.75,5.7) 56(0.25,5.7) 57(-0.25,5.7) 58(-0.75,5.7) 59(-1.25,5.7) 60(-1.75,5.7) 61(-2.25,5.7) 62(-2.75,5.7) 63(-3.25,5.7) 64(-3.75,5.7)
  silkscreen extent -5.82,-4.6 4.6,4.6, body extent -5,-5 5,5, height 1.6
usb_typeB_mini_smd [mm] "5 pins"
  rect 0.5x2.25 smd: 1(-1.6,2.75) 2(-0.8,2.75) 3(0,2.75) 4(0.8,2.75) 5(1.6,2.75)
  rect 2x2.5 smd: Z1(-4.45,2.75) Z2(4.45,2.75) Z3(4.45,-2.75) Z4(-4.45,-2.75)
  round 0.9 hole 0.9 unplated: ""(-2.2,0.15) ""(2.2,0.15)
  silkscreen extent -4,-4.75 4,4.5, body extent -4.8,-5.75 4.8,3.5, height 3.97

## Part data
C1 C3: library part Cap, "Ceramic NP0 +/- 0.1"
C2 C7 C8 C9 C10 C13 C15 C16 C17 C18 C19 C20 C21 C22 C23 C24 C25 C26 C27 C28 C29 C30 C31 C32 C33 C34 C35 C36 C37 C38 C39 C41 C42 C43 C45 C46 C47 C48 C49 C51 C52: library part Cap, "Ceramic X7R 50V"
C4 C11: library part Cap, "Ceramic X7R 16V"
C5 C6: library part Cap, "Ceramic 6.3V X7R"
C12 C14 C44: library part "Cap Pol1", "Ceramic X5R 25V"
C40: library part "Cap Pol1", "Ceramic X7R 16V"
C50: library part C, "CER 50V X7R"
D1 D2: library part LED0, "LED Green"
D3: library part Diode, "Diode Schottky  low Vf, If 1A (PMEG3010ER; MBRX120LF)"
J1: library part USB_Con_Type_B_mini_SMT, "Mini USB SMT Type B 5 Contacts"
J2: library part "Header 4", "Header, 4-Pin"
J3: library part "Header 10", "Header, 10-Pin"
J4: library part USB_Con_Type_B_mini_SMT, "Mini USB SMT Type B 5 Contacts (WE 65100516121)"
J5: library part "Header 3", "Header, 3-Pin"
L1: library part Inductor, "Inductor"
L2 L3 L4 L5 L6 L7 L8 L9: library part Inductor, "WE 742792022"
Q1 Q2 Q3: "BJT NPN"
Q4: library part "MOSFET-P 3pin", "IRLML5103TRPbF; DMG1013UW;"
Q5 Q6 Q7 Q8 Q9 Q10 Q11 Q12: library part "MOSFET-P 3pin"
R1 R2 R3 R4 R5 R6 R7 R8 R9 R10 R11 R12 R13 R14 R15 R16 R17 R18 R19 R20 R21 R22 R23 R24 R25 R26 R27 R28 R29 R30 R31 R32 R33 R34 R35 R36 R37 R38 R39 R40 R41 R42 R43 R44 R45 R47 R48 R49 R50 R51 R52 R53 R54 R55 R56 R57 R58 R59 R60 R61 R62 R63 R64 R65 R66 R67 R68 R69 R70 R71 R72 R73 R74 R75 R76: library part Res1, "Resistor"
R46: library part Resistor_ST, "Resistor"
Tp1 Tp3 Tp4 Tp5 Tp6 Tp7 Tp8 Tp9 Tp10 Tp11 Tp12 Tp13 Tp14 Tp15 Tp16 Tp17 Tp18 Tp19 Tp20 Tp21 Tp22 Tp23 Tp24 Tp25 Tp26 Tp27 Tp28 Tp29 Tp30 Tp31 Tp32 Tp33 Tp34 Tp35 Tp36 Tp37 Tp38 Tp39 Tp40 Tp41 Tp42 Tp43 Tp44 Tp45 Tp46 Tp47 Tp48 Tp49 Tp50 Tp51 Tp52 Tp53 Tp54 Tp55 Tp56 Tp57 Tp58 Tp59 Tp60 Tp61 Tp62 Tp63 Tp64: library part Test_point, "Test point"
U1: library part EEPROM-SOIC8, "EEPROM"
U3: library part LM1117-FIXED-OUT, "LM1117 LDO Fixed output"
U4 U5: library part TVS_Diode_Array
U6: "Serial TTL 232 <-> USB (QFN-32)"
U7: library part 74HC595_27, "8-Bit Serial-Input/Serial or Prallel-Output Shift Register with Latched 3-State Outputs"
U8 U9: library part Led_driver, "(Texas TLC5928; ST STP16CP05)"
Y1: library part CRYSTAL-4p

## Free pads (board coordinates)
  round 5 hole 2.8: Hole(2.5,2.5) Hole(2.5,54.5) Hole(59.5,2.5) Hole(59.5,54.5)

## Via types
v1: diameter 0.6, hole 0.3, Top Layer to Bottom Layer, 196 vias
v2: diameter 0.5, hole 0.2, Top Layer to Bottom Layer, 30 vias
v3: diameter 0.7, hole 0.4, Top Layer to Bottom Layer, 4 vias

## Nets (pads, with @x,y where several pads share a name; then routed paths per layer and width w, separated by ;. In a path a pad name is that pad's centre, name@x,y a point inside that pad or via, vN(x,y) a via of type N, cw(c..) or ccw(c..) an arc to the next point about the centre after c; other vN are vias at no path point)
3V3OUT: C48.1 U6.1 U6.16 | length 17.3
  Bottom Layer w0.25: U6.1@40.96,10.24 40.96,9.2 42.365,7.795 47.72,7.795 48.115,8.19 48.115,9.22 48.015,9.32 48.015,12.645 46.94,13.72 C48.1@46.94,14.27 ; U6.16@45.14,14.34 C48.1@46.94,14.34
+3.3V: C14.1 C15.2 C50.1 C51.2 C52.2 D2.1 J5.2 L2.1 R73.1 Tp3.1 U3.2 U3.4 U7.10 U7.16 U8.24 U9.24 | length 182.1
  Top Layer w0.25: D2.1@13.19,4.67 14.24,4.67 14.44,4.47 v1(14.44,3.97)
  Top Layer w0.35: U8.24@18.665,37.71 19.12,37.71 19.44,38.03 19.44,38.22 ; v1(19.44,38.82) 19.44,38.22 ; C51.2@20.44,38.27 19.49,38.27 19.44,38.22 ; 34.145,37.47 34.54,37.47 ; v1(34.54,39.72) v1(34.54,38.92) 34.54,37.47 ; C52.2@35.69,38.52 35.69,37.47 ; v1(36.94,35.47) 36.94,37.22 36.69,37.47 35.69,37.47 ; v1(40.69,32.72) 41.19,32.72 41.24,32.67 R73.1@41.24,31.72 ; v1(47.19,29.22) 47.24,29.17 55.74,29.17 56.44,28.47 v1(57.19,28.47) ; v1(47.19,33.22) 47.69,32.72 C50.1@48.74,32.72 ; 34.54,37.47 35.69,37.47
  Top Layer w0.45: C14.1@33.29,32.97 33.14,32.82 33.14,31.97 ; 33.14,31.97 33.94,31.97 ; 33.14,31.97 C15.2@33.14,30.97 v1(33.94,30.97) ; v1(33.94,30.97) 33.94,31.97 ; v1(33.94,30.97) v1(34.94,30.97) v1(35.94,30.97) v1(35.94,31.97) v1(34.94,31.97) 33.94,31.97
  Bottom Layer w0.35: Tp3.1@5.5,8.08 7.42,8.08 8.25,7.25 8.25,5.278 9.558,3.97 v1(14.44,3.97) 15.64,3.97 17.61,2 52.5,2 54.25,3.75 54.25,5.25 55.625,6.625 57.75,6.625 59,7.875 59,10.75 ; v1(19.44,38.82) 24.84,38.82 25.74,37.92 32.84,37.92 33.84,38.92 ; U3.4@35.94,35.47 v1(36.94,35.47) ; v1(40.69,32.72) 41.19,32.72 41.245,32.665 U7.16@41.245,31.62 41.245,31.005 42.53,29.72 44.19,29.72 44.69,29.22 v1(47.19,29.22) 48.115,29.22 48.865,29.97 U7.10@48.865,31.62 48.865,32.795 48.44,33.22 v1(47.19,33.22) ; v1(57.19,28.47) 57.19,18.31 59,16.5 59,10.75 ; J5.2@57.54,10.62 58.87,10.62 59,10.75 ; 33.84,38.92 33.84,39.52 34.04,39.72 v1(34.54,39.72) v1(34.54,38.92) 33.84,38.92
  Bottom Layer w0.45: 33.44,34.22 33.19,33.97 33.19,31.97 33.94,31.97 v1(33.94,30.97) v1(34.94,30.97) ; U3.4@34.94,34.22 v1(34.94,31.97) v1(34.94,30.97) ; U3.4@35.34,34.22 35.94,33.62 v1(35.94,31.97) ; U7.16@41.245,31.62 40.29,31.62 39.19,32.72 37.69,32.72 36.94,31.97 v1(35.94,31.97) ; v1(34.94,30.97) v1(35.94,30.97) v1(35.94,31.97)
  Bottom Layer w0.65: L2.1@26.94,32.77 26.94,33.47 27.69,34.22 U3.2@29.54,34.22 33.44,34.22 34.94,34.22 U3.4@35.34,34.22
+5V: BUZ1.1 C12.1 C13.2 C40.1 C41.1 C43.2 C47.2 D1.1 D3.1 J5.1 L3.1 L8.1 Q4.2 Q5.2 Q6.2 Q7.2 Q8.2 Q9.2 Q10.2 Q11.2 Q12.2 R41.1 R55.1 R57.1 R59.1 R61.1 R63.1 R65.1 R67.1 R69.1 R71.1 Tp4.1 U3.3 U4.5 | length 248
  Top Layer w0.25: L8.1@4.5,27.75 v1(3.5,27.75) ; L8.1@4.5,28.5 v1(3.5,28.5) ; D1.1@10.19,4.67 v1(10.19,5.47) ; U4.5@23.66,11.89 v3(23.66,12.69) ; v1(25.94,10.72) 25.94,10.02 R41.1@25.99,9.97 ; Q4.2@40.76,40.452 Q4.2@40.81,40.502 ; Q6.2@44.76,40.452 Q6.2@44.81,40.502 ; Q9.2@48.76,40.452 Q9.2@48.81,40.502 ; R67.1@52.51,38.99 v1(53.31,38.99) ; Q10.2@52.76,40.452 Q10.2@52.81,40.502 ; Q12.2@55.39,35.432 Q12.2@55.44,35.482 ; v1(3.5,27.75) v1(2.5,27.75) v1(2.5,28.5) v1(3.5,28.5) ; v1(3.5,27.75) v1(3.5,28.5)
  Top Layer w0.35: Q4.2@40.76,40.452 40.76,39.94 40.51,39.69 R55.1@40.51,38.99 v1(41.31,38.99) ; Q6.2@44.76,40.452 44.76,39.94 44.51,39.69 R59.1@44.51,38.99 v1(45.31,38.99) ; R65.1@48.51,38.99 48.51,39.69 48.76,39.94 Q9.2@48.76,40.452 ; R65.1@48.51,38.99 v1(49.31,38.99) ; R67.1@52.51,38.99 52.51,39.69 52.76,39.94 Q10.2@52.76,40.452 ; v1(53.69,36.47) 55.19,36.47 55.39,36.27 Q12.2@55.39,35.432 55.39,34.92 55.14,34.67 R71.1@55.14,33.97
  Top Layer w0.45: Q4.2@40.81,40.502 v1(40.81,41.47) ; Q6.2@44.81,40.502 v1(44.81,41.47) ; Q9.2@48.81,40.502 v1(48.81,41.47) ; Q10.2@52.81,40.502 v1(52.81,41.47)
  Bottom Layer w0.25: Tp4.1@5.5,10.62 9.19,10.62 ; v1@10.12,5.54 v1(10.19,5.47) ; L3.1@18.64,6.97 18.64,10.92 19.61,11.89 C43.2@23.66,11.89 ; v3(23.66,12.69) C43.2@23.66,11.89 ; v1(25.94,10.72) 25.94,11.72 25.77,11.89 C43.2@23.66,11.89
  Bottom Layer w0.35: R57.1@40.51,43.99 40.51,43.29 40.76,43.04 Q5.2@40.76,42.527 ; R61.1@44.51,43.99 44.51,43.29 44.76,43.04 Q7.2@44.76,42.527 ; R63.1@48.51,43.99 48.51,43.29 48.76,43.04 Q8.2@48.76,42.527 ; R69.1@52.51,43.99 52.51,43.29 52.76,43.04 Q11.2@52.76,42.527 ; 53.24,17.5 56.75,17.5 57.54,16.71 J5.1@57.54,13.16
  Bottom Layer w0.45: D3.1@30.44,3.25 D3.1@30.44,3.52 ; R57.1@40.51,43.99 v1(41.67,43.99) ; Q5.2@40.76,42.527 40.81,42.477 v1(40.81,41.47) v1(41.69,41.47) ; R61.1@44.51,43.99 45.67,43.99 ; Q7.2@44.81,42.477 v1(44.81,41.47) v1(45.69,41.47) ; R63.1@48.51,43.99 49.67,43.99 ; Q8.2@48.81,42.477 v1(48.81,41.47) v1(49.69,41.47) ; R69.1@52.51,43.99 53.67,43.99 ; Q11.2@52.81,42.477 v1(52.81,41.47) v1(53.69,41.47)
  Bottom Layer w0.65: C41.1@14.94,7.02 16.59,7.02 C40.1@16.69,7.12 16.84,6.97 L3.1@18.64,6.97 ; C12.1@26.54,36.52 U3.3@29.54,36.52 32.74,36.52 33.69,37.47 35.69,37.47 ; C13.2@35.69,38.52 35.69,37.47 ; v1(41.31,38.99) 41.69,39.37 v1(41.69,41.47) 41.69,45.22 ; v1(45.31,38.99) 45.69,39.37 v1(45.69,41.47) 45.69,45.22 ; v1(49.31,38.99) 49.69,39.37 v1(49.69,41.47) 49.69,45.22 ; BUZ1.1@53.24,22.97 53.19,23.02 53.19,29.47 53.69,29.97 53.69,39.37 ; v1(53.31,38.99) 53.69,39.37 ; 35.69,37.47 36.94,37.47 37.44,37.97 37.44,44.035 38.625,45.22 41.69,45.22 ; 41.69,45.22 45.69,45.22 ; 45.69,45.22 49.69,45.22 ; 49.69,45.22 53.44,45.22 53.69,44.97 v1(53.69,41.47) 53.69,39.37
  Bottom Layer w0.85: 3,28.125 3.5,28.125 ; C40.1@16.69,7.12 16.69,5.22 ; BUZ1.1@53.24,22.97 53.24,17.5 53.24,4.28 52,3.04 31.71,3.04 31.5,3.25 30.44,3.25 17.94,3.25 16.69,4.5 16.69,5.22 ; 3.5,28.125 5.625,28.125 9.19,24.56 9.19,10.62 9.19,5.54 9.51,5.22 16.69,5.22 ; 3.5,28.125 v1(3.5,27.75) v1(2.5,27.75) v1(2.5,28.5) v1(3.5,28.5) 3.5,28.125
BOOT0: J2.3 R3.2 U2.60 | length 49.7
  Top Layer w0.25: v1(25.94,22.22) 25.94,22.67 26.285,23.015 U2.60@27.36,23.015 ; v1(43.44,21.72) 49.19,21.72 49.44,21.97 50.69,21.97 50.94,22.22 v1(51.69,22.22) ; v1(52.25,7.25) 52.25,8.08 R3.2@52.39,8.22 53.19,8.22 53.44,8.47 53.44,10.19 53.87,10.62 J2.3@55,10.62
  Bottom Layer w0.25: v1(25.94,22.22) 26.015,22.295 34.295,22.295 35,23 36.75,23 37.745,22.005 42.405,22.005 42.69,21.72 v1(43.44,21.72) ; v1(51.69,22.22) 51.69,21.47 52.25,20.91 v1(52.25,7.25)
BUSY: R49.2 U2.14 | length 9.4
  Top Layer w0.25: R49.2@12.51,31.49 13.56,31.49 14.31,30.74 14.31,29.99 15.06,29.24 17.73,29.24 18.91,28.06 U2.14@18.91,26.965
BUZZER: R47.2 U2.41 | length 39
  Top Layer w0.25: U2.41@21.91,15.565 21.91,16.61 v1(21.94,16.64) ; v1(28.19,15.72) 29.765,14.145 34.898,14.145 37.973,17.22 43.026,17.22 44.951,19.145 48.765,19.145 v1(49.44,18.47)
  Bottom Layer w0.25: v1(21.94,16.64) 22.77,17.47 26.397,17.47 28.147,15.72 v1(28.19,15.72) ; v1(49.44,18.47) 49.44,20.22 50.19,20.97 R47.2@50.19,24.52
C\S\: R52.2 U2.21 | length 7
  Top Layer w0.25: R52.2@12.51,26.99 14.06,26.99 14.31,26.74 14.31,23.533 14.828,23.015 U2.21@15.96,23.015
COL0: R72.2 U7.15 | length 7.2
  Top Layer w0.25: R72.2@38.31,36.04 38.31,35.35 39.265,34.395 40.87,34.395 40.97,34.295 41.615,34.295 v1(42.44,33.47)
  Bottom Layer w0.25: U7.15@42.44,31.845 v1(42.44,33.47)
COL1: R56.1 U7.1 | length 3.7
  Top Layer w0.25: R56.1@39.81,35.79 39.81,35.1 39.94,34.97 v1(41.365,34.97)
  Bottom Layer w0.25: v1(41.365,34.97) U7.1@41.365,36.34
COL2: R58.1 U7.2 | length 2.9
  Top Layer w0.25: R58.1@42.31,36.29 42.31,35.35 v1(42.69,34.97)
  Bottom Layer w0.25: U7.2@42.635,36.34 42.69,36.285 v1(42.69,34.97)
COL3: R60.1 U7.3 | length 2.2
  Top Layer w0.25: R60.1@43.81,35.79 43.905,35.695 v1(43.905,34.97)
  Bottom Layer w0.25: v1(43.905,34.97) U7.3@43.905,36.34
COL4: R62.1 U7.4 | length 5.4
  Top Layer w0.25: v1(45.19,34.97) 45.94,34.22 46.735,34.22 47.41,34.895 47.615,34.895 47.81,35.09 R62.1@47.81,35.79
  Bottom Layer w0.25: U7.4@45.175,36.34 45.175,34.985 v1(45.19,34.97)
COL5: R64.1 U7.5 | length 2.7
  Top Layer w0.25: R64.1@46.31,36.29 46.44,36.16 v1(46.44,34.97)
  Bottom Layer w0.25: v1(46.44,34.97) 46.445,34.975 U7.5@46.445,36.34
COL6: R66.1 U7.6 | length 5.7
  Top Layer w0.25: v1(47.69,34.22) 48.44,34.97 49.94,34.97 50.31,35.34 R66.1@50.31,36.29
  Bottom Layer w0.25: v1(47.69,34.22) U7.6@47.69,35.84
COL7: R68.1 U7.7 | length 6
  Top Layer w0.25: v1(48.94,34.22) 50.19,34.22 50.94,34.97 51.56,34.97 51.81,35.22 R68.1@51.81,35.79
  Bottom Layer w0.25: v1(48.94,34.22) U7.7@48.94,36.34
COL_EXTRA: R70.1 U2.2 | length 36.3
  Top Layer w0.25: U2.2@24.91,26.965 24.91,27.983 26.24,29.313 26.24,33.32 26.715,33.795 28.813,33.795 30.038,35.02 34.89,35.02 36.19,33.72 v1(38.19,33.72) ; v1(40.59,33.72) 41.235,33.72 42.235,32.72 45.94,32.72 47.39,31.27 51.99,31.27 52.44,31.72 R70.1@52.44,32.52
  Bottom Layer w0.25: v1(38.19,33.72) v1(40.59,33.72)
D0: R53.2 U2.22 | length 5.8
  Top Layer w0.25: R53.2@12.51,25.49 13.56,25.49 13.81,25.24 13.81,23.326 14.621,22.515 U2.22@15.96,22.515
D1: R54.2 U2.23 | length 4.6
  Top Layer w0.25: R54.2@12.51,23.99 13.06,23.99 13.31,23.74 13.31,23.119 14.414,22.015 U2.23@15.96,22.015
D/C\: R51.2 U2.20 | length 8
  Top Layer w0.25: R51.2@12.51,28.49 14.31,28.49 14.81,27.99 14.81,23.74 15.035,23.515 U2.20@15.96,23.515
DISC: R43.2 U2.52 | length 12.8
  Top Layer w0.25: U2.52@27.36,19.015 29.645,19.015 v1(29.94,18.72)
  Bottom Layer w0.25: v1(29.94,18.72) 29.94,15.47 30.69,14.72 33.44,14.72 34.14,14.02 R43.2@34.14,11.97
DRX: J2.2 R6.2 R10.1 | length 5.6
  Top Layer w0.25: R10.1@52.39,9.72 R6.2@52.39,11.22 53.19,11.22 53.5,11.53 53.5,12.75 53.91,13.16 J2.2@55,13.16
DTX: J2.1 R4.2 R7.1 | length 5.2
  Top Layer w0.25: R7.1@52.39,12.72 R4.2@52.39,14.22 53.5,14.22 53.75,14.47 53.75,15.25 54.2,15.7 J2.1@55,15.7
EN_LED_COL: R73.2 U2.3 U7.13 | length 33
  Top Layer w0.25: U2.3@24.41,26.965 24.41,28.19 25.74,29.52 25.74,33.695 26.34,34.295 28.606,34.295 29.831,35.52 35.14,35.52 36.19,34.47 38.483,34.47 40.015,32.938 40.015,31.395 40.69,30.72 42.69,30.72 ; R73.2@42.64,31.72 42.64,30.77 42.69,30.72 ; v1(45.175,30.235) 44.69,30.72 42.69,30.72
  Bottom Layer w0.25: v1(45.175,30.235) U7.13@45.175,31.64
EN_LED_ROW: R74.2 U2.4 U8.21 U9.21 | length 33.1
  Top Layer w0.25: R74.2@16.69,35.92 16.69,37.685 U8.21@16.715,37.71 ; U2.4@23.91,26.965 23.91,28.397 25.235,29.722 25.235,34.468 24.755,34.948 24.755,37.405 v1(24.19,37.97) ; v1(25.94,35.47) 28.117,35.47 29.417,36.77 31.715,36.77 31.955,37.01 U9.21@31.955,37.96
  Bottom Layer w0.25: v1(16.69,36.72) 17.99,38.02 24.84,38.02 25.515,37.345 25.515,35.895 v1(25.94,35.47)
FRAME_SHLD: J1.Z1 J1.Z2 J1.Z3 J1.Z4 J3.Z1 J3.Z2 J4.Z1 J4.Z2 J4.Z3 J4.Z4 L4.2 L9.2 pad.Hole | length 476.2
  Top Layer w0.65: J3.Z2@3.01,31.07 0.82,31.07 0.75,31 ; J3.Z1@3.01,39.43 0.93,39.43 0.75,39.25 ; L4.2@16.69,1.92 16.69,0.81 16.75,0.75 ; J1.Z4@19.61,1.74 J1.Z1@19.61,7.24 ; J1.Z3@28.51,1.74 J1.Z2@28.51,7.24 ; J4.Z4@35.11,1.74 J4.Z1@35.11,7.24 ; J4.Z3@44.01,1.74 J4.Z2@44.01,7.24 ; L9.2@47.19,1.92 47.19,0.81 47.25,0.75 ; 0.75,31 0.75,39.25 ; 0.75,31 0.75,4.25 pad.Hole@2.5,2.5 4.25,0.75 16.75,0.75 ; 0.75,39.25 0.75,52.75 pad.Hole@2.5,54.5 4.25,56.25 57.75,56.25 pad.Hole@59.5,54.5 61,53 61,4 pad.Hole@59.5,2.5 57.75,0.75 47.25,0.75 ; 16.75,0.75 44.01,0.75 47.25,0.75
  Bottom Layer w0.65: pad.Hole@0.75,4 4,0.75 57.5,0.75 61,4.25 61,52.75 57.5,56.25 4,56.25 0.75,53 pad.Hole@0.75,4
FTDIUSB_N: J4.2 U5.1 U5.6 U6.15 | length 16.4
  Top Layer w0.35: J4.2@38.76,7.24 38.76,8.69 38.335,9.115 38.335,13.265 38.885,13.815 v1@38.885,14.24
  Bottom Layer w0.25: v1(38.76,14.24) v1@38.81,14.29
  Bottom Layer w0.35: v1@38.81,14.29 38.81,15.668 39.432,16.29 43.763,16.29 44.585,15.468 44.585,14.79 44.56,14.765 U6.15@44.56,14.34
FTDIUSB_P: J4.3 U5.3 U5.4 U6.14 | length 14.6
  Top Layer w0.35: v1@39.435,14.24 39.435,13.815 39.985,13.265 39.985,9.115 39.56,8.69 J4.3@39.56,7.24
  Bottom Layer w0.25: v1(39.56,14.24) v1@39.56,14.324
  Bottom Layer w0.35: v1@39.56,14.324 39.31,14.574 39.31,15.39 39.66,15.74 43.535,15.74 44.035,15.24 44.035,14.79 44.06,14.765 U6.14@44.06,14.34